# Altium PCB ADF_1st_mixer.PcbDoc
Units mm, origin at the board's own origin, x right, y up, seen from the top; angles counter-clockwise.
Board outline 49.91 x 49.91 mm, 2 copper layers (Top Layer, Bottom Layer); 27 components, 23 nets, 96 pads, 0 vias.
Unrouted connection lines stored in the file: 56.
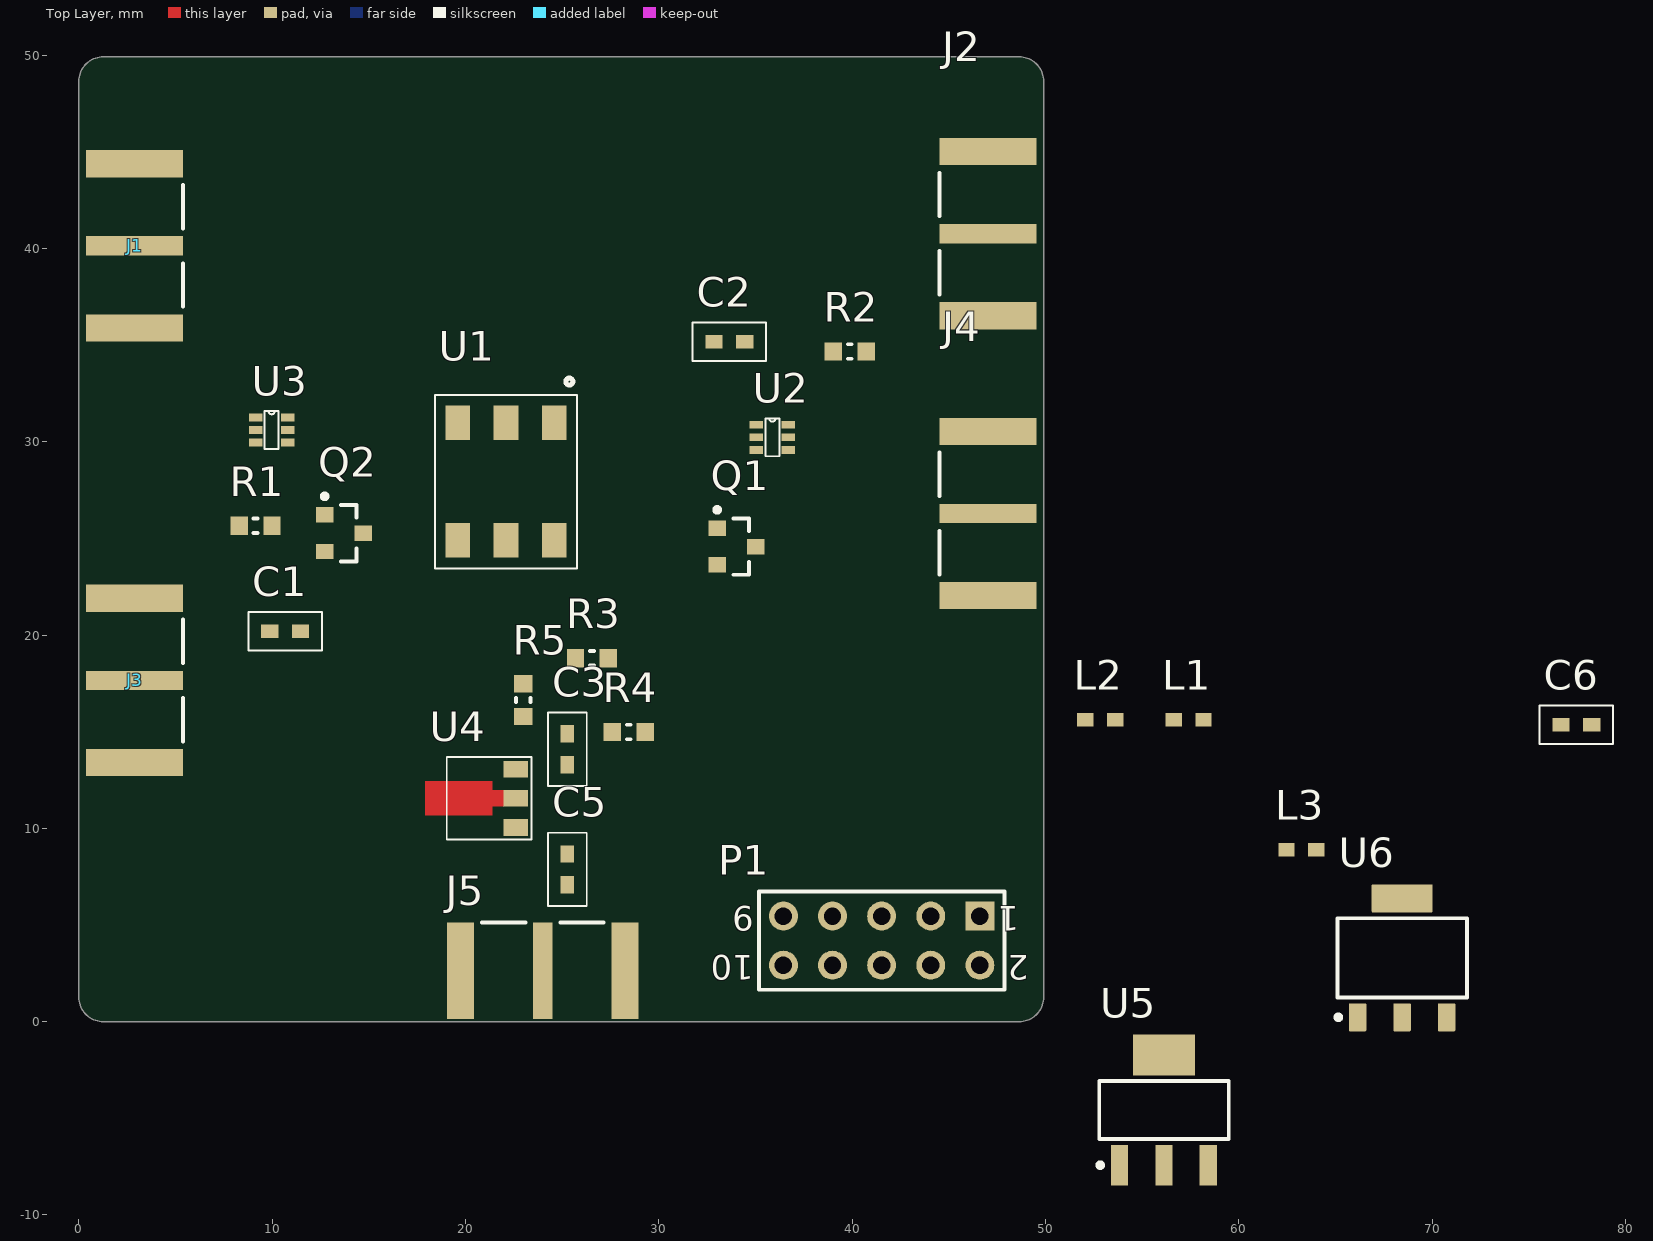
[diagram p0: Top Layer view]
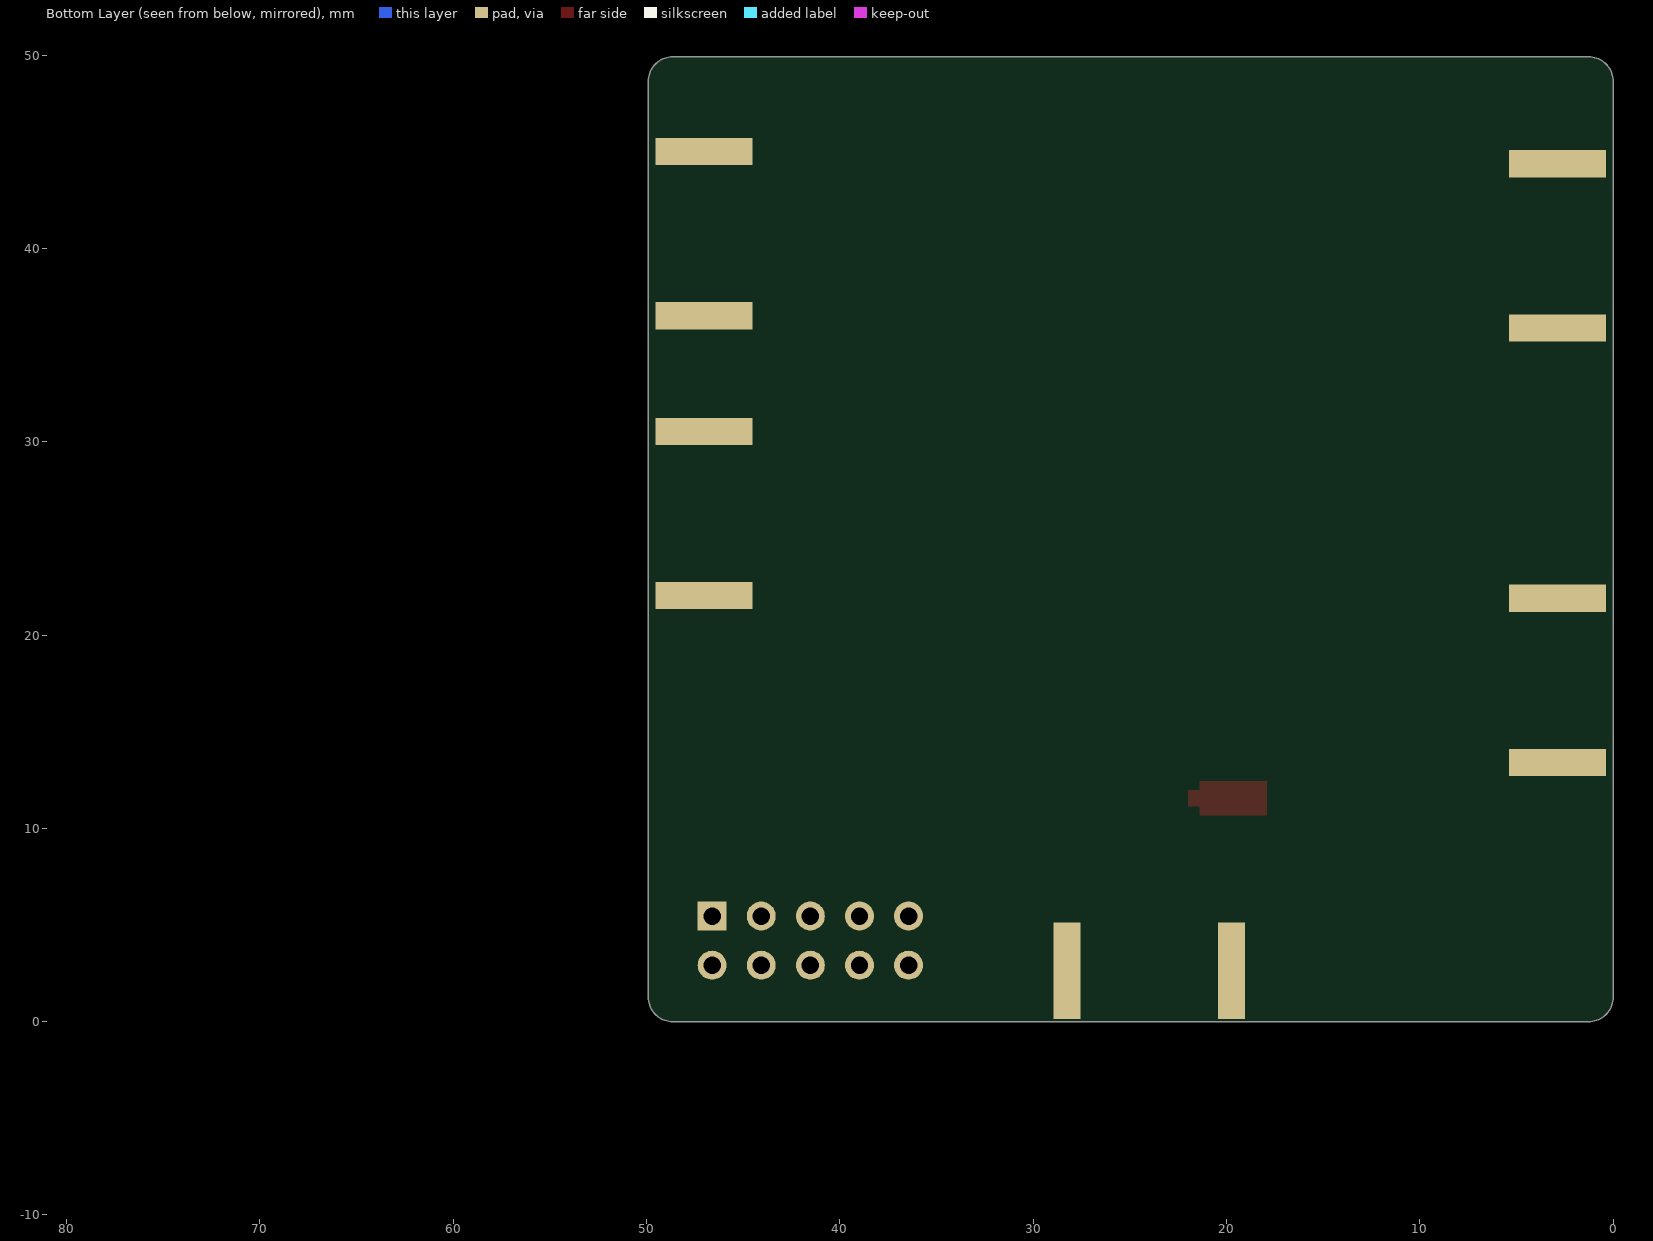
[diagram p1: Bottom Layer view, seen from below]

## Layer stack, top to bottom
Top Solder: solder mask 0.0102, Solder Resist, Dk 3.5
Top Layer: signal copper 0.0356
Dielectric 1: dielectric 0.32, FR-4, Dk 4.8
Bottom Layer: signal copper 0.0356
Bottom Solder: solder mask 0.0102, Solder Resist, Dk 3.5

## Board outline
0,1.27 0,48.641 cw(c1.27,48.641) 1.27,49.911 48.641,49.911 cw(c48.641,48.641) 49.911,48.641 49.911,1.27 cw(c48.641,1.27) 48.641,0 1.27,0 cw(c1.27,1.27)

## Design rules (kind name [scope] priority, off if disabled: settings)
Clearance [All] p1: gap=0.254 ignorepadtopadclearanceinfootprint=FALSE except(0: Arc-Hole Track-Hole SMDPad-Hole THPad-Hole Via-Hole Fill-Hole Poly-Hole Region-Hole Text-Hole)
PolygonConnect [All] p1: connectstyle=Relief reliefconductorwidth=0.254 reliefentries=4 polygonreliefangle="90 Angle" airgapwidth=0.254
RoutingVias [All] p1: holewidth=0.711 width=1.27 viastyle="Through Hole" minholewidth=0.711 minwidth=1.27 maxholewidth=0.711 maxwidth=1.27
SolderMaskExpansion [All] p1: expansion=0.102
Width [All] p1: maxlimit=0.254 minlimit=0.254 preferedwidth=0.254
30 further rules are at their usual default settings.

## Components (designator, comment, footprint, x,y, rotation, side; value= is the part's Value field where it differs from the comment)
C1 "10nF 0603 NP0" C0603_murata 10.668,20.193 r0 top
C2 "10nF 0603 NP0" C0603_murata 33.655,35.179 r0 top
C3 "10nF 0603 NP0" C0603_murata 25.273,14.097 r270 top
C5 "10nF 0603 NP0" C0603_murata 25.273,7.874 r270 top
C6 "10nF 0603 NP0" C0603_murata 77.47,15.367 r0 top
J1 "32K145-400L5" ROS-32K145-400L5_V 0.381,40.132 r90 top
J2 "32K145-400L5" ROS-32K145-400L5_V 49.53,40.767 r270 top
J3 "32K145-400L5" ROS-32K145-400L5_V 0.381,17.653 r90 top
J4 "32K145-400L5" ROS-32K145-400L5_V 49.53,26.289 r270 top
J5 "32K145-400L5" ROS-32K145-400L5_V 24.003,0.127 r180 top
L1 "742792608" SMD-0603 57.404,15.621 r0 top
L2 "742792608" SMD-0603 52.832,15.621 r0 top
L3 "742792608" SMD-0603 63.246,8.89 r0 top
P1 "Header 5X2" HDR2X5 46.609,5.461 r180 top
Q1 "BSS138LT3G" ONSC-SOT-23-3-318-08_V 34.02,24.577 r0 top
Q2 "BSS138LT3G" ONSC-SOT-23-3-318-08_V 13.716,25.273 r0 top
R1 "Resistor" RESC1608X06N_0603 9.144,25.654 r0 top value=10k
R2 "Resistor" RESC1608X06N_0603 39.878,34.671 r0 top value=10k
R3 "Resistor" RESC1608X06N_0603 26.543,18.796 r180 top value=18R
R4 "Resistor" RESC1608X06N_0603 28.448,14.986 r0 top value=300R
R5 "Resistor" RESC1608X06N_0603 22.987,16.637 r270 top value=300R
U1 "ELCM-25MH" SM-87 24.598,30.988 r180 top
U2 "AS213-92LF" SC70_6 35.052,30.876 r0 top
U3 "AS213-92LF" SC70_6 9.145,31.257 r0 top
U4 "AH1G" SOT-89 22.606,10.047 r90 top
U5 "LM1117IMPX-5.0/NOPB" MP04A_L 56.134,-4.572 r90 top
U6 "LM1117MPX-3.3" DCY0004A_L 68.453,3.302 r90 top

## Footprints (in the part's own frame and the unit in brackets; to place one, negate y for a bottom-side part, rotate by r counter-clockwise, add the part's x,y. Pads: shape width x height; smd on the part's side, far side on the other; paste and mask are expansions set on the pad)
C0603_murata [mm]
  rect 0.9x0.7 smd: 1(-0.8,0) 2(0.8,0)
  silkscreen extent -1.9,-1 1.9,1
DCY0004A_L [mm] "SOT223, 4-Leads, Body 6.7x3.7mm, Pitch 2.3mm, IPC High Density"
  rrect11% 1.45x0.9 smd: 1(-3.075,2.3) 2(-3.075,0) 3(-3.075,-2.3)
  rrect7% 1.45x3.15 smd: 4(3.075,0)
  silkscreen extent -3.2,-3.35 2.05,3.42, body extent -3.5,-3.25 3.5,3.25, height 1.62
HDR2X5 [mm] "Connector; Header; 5x2 Position"
  rect 1.5x1.5 hole 0.9: 1(0,0)
  round 1.5 hole 0.9: 2(0,2.54) 3(2.54,0) 4(2.54,2.54) 5(5.08,0) 6(5.08,2.54) 7(7.62,0) 8(7.62,2.54) 9(10.16,0) 10(10.16,2.54)
  silkscreen extent -1.27,-1.27 11.43,3.81
MP04A_L [mm] "SOT223, 4-Leads, Body 6.5x3.5mm, Pitch 2.3mm, Lead Span 7mm, IPC High Density"
  rect 2.1x0.9 smd: 1(-2.85,2.3) 2(-2.85,0) 3(-2.85,-2.3)
  rect 2.1x3.2 smd: 4(2.85,0)
  silkscreen extent -2.97,-3.35 1.5,3.42, body extent -1.86,-3.35 1.86,3.35, height 1.8
ONSC-SOT-23-3-318-08_V [mm] "SOT23, 3-Leads, Body 2.92x1.3mm, Pitch 0.95mm"
  rect 0.9x0.8 smd: 1(-1,0.95) 2(-1,-0.95) 3(1,0)
  silkscreen extent -1.12,-1.46 0.65,2.02, body extent -0.65,-1.46 0.65,1.46, height 1.11
RESC1608X06N_0603 [mm] "Chip Resistor, 2-Leads, Body 1,60x0,80mm, IPC Medium Density"
  rect 0.9x0.95 smd: 1(-0.85,0) 2(0.85,0)
  silkscreen extent -0.1,-0.38 0.1,0.38, body extent -0.85,-0.45 0.85,0.45, height 0.55
ROS-32K145-400L5_V [mm] "SMA Right Angle Jack, Edge Mount, 14.25x9.5x4.46mm, Rosenberger Recommended"
  rect 1x5 smd: 1(0,-2.5)
  rect 1.4x5 smd: MP(-4.25,-2.5) MP(4.25,-2.5)
  rect 1.4x5 smd far side paste-2: ""(-4.25,-2.5) ""(4.25,-2.5)
  silkscreen extent -3.15,-5 3.15,-5, body extent -4.75,-4.75 4.75,9.5, height 4.46
SC70_6 [mm]
  rect 0.7x0.4 smd: 1(0,0) 2(0,-0.65) 3(0,-1.3) 4(1.65,-1.3) 5(1.65,-0.65) 6(1.65,0)
  silkscreen extent 0.47,-1.63 1.18,0.33
SM-87 [mm] "SM-87 Mixer package"
  rect 1.27x1.78 smd: GND(0,0) GND(2.5,6.09) GND(5,6.09) IF(2.5,0) LO(0,6.09) RF(5,0)
  silkscreen extent -1.17,-2.31 6.18,7.55
SMD-0603 [mm]
  rect 0.85x0.7 smd: 1(-0.775,0) 2(0.775,0)
  body extent -0.8,-0.4 0.8,0.4, height 0.79
SOT-89 [mm] "SOT-89/TO-243C case"
  rect 0.86x1.27 smd: 1(0,0) 2(1.51,0) 3(3.02,0)
  Top Layer region: 1.075,0.625 1.95,0.625 1.95,1.215 1.075,1.215
  Top Layer region: 0.61,1.215 2.41,1.215 2.41,4.695 0.61,4.695
  silkscreen extent -0.63,-0.8 3.65,3.57

## Part data
C1 C2 C3 C5 C6: "10nF 0603 NP0 muRata", Capacitance=10nF, Case/Package=0603, Case Code (Metric)=1608, Dielectric=C0G, Manufacturer 1=Murata, Manufacturer Part Number 1=GRM1885C1H103JA01D, Max Operating Temperature=125°C, Min Operating Temperature=-55°C, Package Quantity=4000, Supplier Part Number 1=81-GRM1885C1H103JA1D, Tolerance=5%, Voltage=50V, Case Code (Imperial)=0603, ComponentLink1Description=https://datasheet.ciiva.com/41860/partnumbering-e-01-41860759.pdf, ComponentLink1URL=https://datasheet.ciiva.com/41860/partnumbering-e-01-41860759.pdf, ComponentLink2Description=https://datasheet.ciiva.com/29537/partnumbering-e-01-29537910.pdf, ComponentLink2URL=https://datasheet.ciiva.com/29537/partnumbering-e-01-29537910.pdf, Depth=0.8mm, Height=0.8mm, Lead Free="Lead Free", Lead Pitch=0.5mm, Length=1.6mm, Material=Ceramic, Packaging="Tape and Reel", Pricing 1="1=0.13, 10=0.05, 50=0.05, 100=0.035, 1000=0.024, 10000=0.016 (USD)", REACH SVHC="No SVHC", Stock 1=5, Supplier 1=Mouser, Termination=SMD/SMT, Thickness=0.035inch, Voltage Rating=50V, Voltage Rating (DC)=50V, Width=0.8mm
J1 J2 J3 J4 J5: "SMA Right Angle Jack, Edge Mount, Up to 18 GHz, -55 to 155 degC", ComponentLink1Description="Manufacturer URL", ComponentLink1URL=http://www.rosenberger.de, ComponentLink2Description=Datasheet, ComponentLink2URL=http://rosenberger.de/ok/images/documents/db/32K145-400L5.pdf, ComponentLink3Description="Package Specification", ComponentLink3URL=http://rosenberger.de/ok/images/documents/db/32K145-400L5.pdf, ComponentLink4Description="Series Overview / Design Note", ComponentLink4URL=http://rosenberger.de/ok/images/documents/spez/32.pdf, ComponentLink5Description="Webshop / RFQ", ComponentLink5URL=http://www.rosenberger.com/en/contact/sales/, DatasheetVersion=b00, Desgin Note 2="For more information about DRC setting, please look at following webpage, http://techdocs.altium.com/display/SCRT/Design+Rule+for+Edge-Mount+Connectors", Design Note 1="Footprint in library is a generic example - only application specific footprint delivers High Performance", Mounting Technology="Surface Mount", PackageDescription="SMA Right Angle Jack, Edge Mount, 14.25 x 9.5 x 4.46 mm", PackageReference=32K145-400L5, PackageVersion=b00, PartNumber=32K145-400L5
L1 L2 L3: "SMD EMI Suppression Ferrite Bead WE-CBF, Z = 47 Ohm", DC_Resistance=0R1, ComponentLink1Description="Manufacturer URL", ComponentLink1URL=http://www.we-online.com, ComponentLink2Description=Datasheet, ComponentLink2URL=http://www.we-online.de/katalog/media/pdf/742792608.pdf, DatasheetVersion=Dec-2005, Impedance="47 Ohm", OrderCode=1635681RL, PackageDescription="Chip Inductor, 2-Leads, Body 1.6 x 0.8 mm", PackageReference=SMD-0603, PackageVersion=2009, Seller=Farnell
P1: "Header, 5-Pin, Dual row", LatestRevisionDate=17-Jul-2002, LatestRevisionNote="Re-released for DXP Platform.", Publisher="Altium Limited"
Q1 Q2: library part CMP-1058-00765-1, "Power MOSFET, 200 mA, 50 V, N-Channel, 3-Pin SOT-23, Pb-Free, Tape and Reel", Manufacturer="On Semiconductor", Package Type=SOT-23-3, Channel Polarity="N Channel", Ciss Typ (pF)=40, ComponentLink1Description="Manufacturer URL", ComponentLink1URL=http://www.onsemi.com/, ComponentLink2Description=Datasheet, ComponentLink2URL=http://www.onsemi.com/pub_link/Collateral/BSS138LT1-D.PDF, ComponentLink3Description="Package Specification", ComponentLink3URL=http://www.onsemi.cn/pub_link/Collateral/318-08.PDF, Configuration=Single, Coss Typ (pF)=12, Crss Typ (pF)=3.5, DatasheetVersion="Rev. 8", ID Max (A)=0.2, Mounting Technology="Surface Mount", PackageDescription="3-Pin Small Outline Transistor, Body 2.92 x 1.3 mm, Pitch 0.95 mm", PackageReference=SOT-23-3-318-08, PackageVersion="Rev. AP, 11/2009", Packing="Tape and Reel", PartNumber=BSS138LT3G, PD Max (W)=0.225, RoHS=Pb-Free, V(BR)DSS Min (V)=50, VGS(th) Max (V)=1.5, VGS Max (V)=20
R1 R2: library part Resistor_SMD_Generic, "Generic SMD Resistor", Manufacturer=SUSUMU, ManufacturerRef=RR0816P-104-B-T5, PowerRating=63mW, TemperatureCoeff="± 25ppm/°C", Tolerance="± 0.1%", Voltage=75V, OrderCode=1653254RL, PackageDescription=SMD, PackageReference=SMD-0603, PriceEuro=0.085, Publisher=atr, Seller=Farnell, Type="Thin Film"
R3 R4 R5: library part Resistor_0R_0603_Bulk, "Bulk SMD Resistor", Manufacturer=PANASONIC, ManufacturerRef=ERJ3GEY0R00V, PowerRating=100mW, TemperatureCoeff="± 200ppm/°C", Tolerance=-, Voltage=75V, OrderCode=2059527RL, PackageDescription=SMD, PackageReference=SMD-0603, PriceEuro=0.005, Published=15.5.2014, Publisher=atr, Seller=Farnell, Type="Thick Film"
U1: Manufacturer 1="TE Connectivity MA-COM", Manufacturer Part Number 1=ELCM-25MHTR, RF Power=+9dBm, ComponentLink1Description=http://www.macomtech.com/DataSheets/ELCM-25MH.pdf, ComponentLink1URL=http://www.macomtech.com/DataSheets/ELCM-25MH.pdf, LO Drive=+13dBm, Stock 1=0, Supplier 1=Avnet, Supplier Part Number 1=ELCM-25MH
U2 U3: "Switch SPDT 0.1-3GHZ GAAS SC70-6", Frequency - Lower=100MHz, Frequency - Upper=3GHz, Insertion Loss @ Frequency="0.5dB @ 3GHz", Isolation @ Frequency="19dB @ 3GHz (typ)", Manufacturer 1="Skyworks Solutions Inc.", Operating Temperature="-40°C ~ 85°C", Package / Case="6-TSSOP, SC-88, SOT-363", Supplier Device Package=SC-70-6, Supplier Part Number 1=863-1238-1-ND, Voltage - Supply=3V, Category="RF/IF and RFID", Circuit=SPDT, ComponentLink1Description=http://www.skyworksinc.com/uploads/documents/200193D.pdf, ComponentLink1URL=http://www.skyworksinc.com/uploads/documents/200193D.pdf, Features=-, IIP3="40dBm (typ)", Impedance="50 Ohm", Manufacturer Part Number 1=AS213-92LF, P1dB="27dBm (typ) IP1dB", Packaging="Cut Tape (CT)", Pricing 1="1=0.41, 100=0.3393 (EUR)", RF Type="Bluetooth, WLAN", RoHS="RoHS Compliant", Stock 1=26253, Supplier 1=Digi-Key, Topology=Reflective
U4: "250-4000MHz MMIC", Case/Package=SOT-89, Frequency=4GHz, Manufacturer 1=TriQuint, Manufacturer Part Number 1=AH1, Supplier Part Number 1=15B6194, Supply Voltage=5V, ComponentLink1Description=https://www.verical.com/server-webapp/html/getDatasheet?partID=559390, ComponentLink1URL=https://www.verical.com/server-webapp/html/getDatasheet?partID=559390, Gain=13.5dB, Mount="Surface Mount", Number of Channels=1, P1dB=+22dBm, Pricing 1="1=37.74, 25=34.58, 50=32.12, 100=31.07, 250=30.01 (USD)", Radiation Hardening=No, Stock 1=0, Supplier 1=Newark
U5: library part CMP-0062-01628-3, "800mA Low-Dropout Linear Regulator, 4-pin SOT-223, Pb-Free", Manufacturer="National Semiconductor", PackageTopMarking=XYTT*N06B, PowerWise=N, Code_IPC=SOT223-4, Code_JEDEC=TO-261-AA, ComponentLink1Description="Manufacturer URL", ComponentLink1URL=http://www.national.com/, ComponentLink2Description="LM1117 Datasheet", ComponentLink2URL=http://www.national.com/ds/LM/LM1117.pdf, ComponentLink3Description="LM1117 Web Page", ComponentLink3URL=http://www.national.com/pf/LM/LM1117.html, ComponentLink4Description="MP04A Package Page", ComponentLink4URL=http://www.national.com/packaging/folders/mp04a.html, CompType="LDO IC", DatasheetVersion=Apr-2006, High-Reliability=Y, PackageDescription="Molded SOT-223, 6.50 x 3.56 x 1.6mm Body, 4 Lead, 2.3mm Pitch", PackageReference=MP04A, PackageVersion="revB, Apr-2003", PartNumber=LM1117IMPX-5.0/NOPB, PinCount=4, RevisionNote="SCH symbol layout adjusted", RoHS=Y
U6: library part CMP-0062-01659-4, "800mA Low-Dropout Linear Regulator, 4-pin SOT-223", Manufacturer="Texas Instruments", PackageTopMarking=XYTT*N05A, PowerWise=N, Code_IPC=SOT223-4, Code_JEDEC=TO-261-AA, ComponentLink1Description="Datasheet URL", ComponentLink1URL=http://www.ti.com/general/docs/lit/getliterature.tsp?genericPartNumber=LM1117-N&fileType=pdf, CompType="LDO IC", High-Reliability=Y, PackageDescription="Molded SOT-223, 6.50 x 3.56 x 1.6mm Body, 4 Lead, 2.3mm Pitch", PackageReference=DCY0004A, PartNumber=LM1117MPX-3.3, PinCount=4, RoHS=N

## Nets (pads, with @x,y where several pads share a name; then routed paths per layer and width w, separated by ;. In a path a pad name is that pad's centre, name@x,y a point inside that pad or via, vN(x,y) a via of type N, cw(c..) or ccw(c..) an arc to the next point about the centre after c; other vN are vias at no path point)
3.3V: C1.1 C2.2 R1.2 R2.2 U6.2
5V: C6.2 L1.1 L3.1 U5.2
GND: C1.2 C2.1 C6.1 J1.MP J2.MP J3.MP J4.MP J5.MP P1.9 P1.10 Q1.2 Q2.2 R4.2 R5.2 U1.GND U3.2 U4.2 U5.1 U6.1
NetC3_1: C3.1 R3.1 R5.1
NetC3_2: C3.2 L3.2 U4.3
NetC5_1: C5.1 U4.1
NetC5_2: C5.2 J5.1
NetJ1_1: J1.1 U3.1
NetJ2_1: J2.1 U3.3
NetJ3_1: J3.1 U2.1
NetJ4_1: J4.1 U2.3
NetL1_2: L1.2 U6.3
NetL2_2: L2.2 U5.3
NetQ1_1: Q1.1 U2.4
NetQ1_3: Q1.3 R2.1 U2.6
NetQ2_1: Q2.1 U3.4
NetQ2_3: Q2.3 R1.1 U3.6
NetR3_2: R3.2 R4.1 U1.LO
NetU1_IF: U1.IF U2.5
NetU1_RF: U1.RF U3.5
RX_Enable: P1.4
TX_Enable: P1.3
VCC: L2.1 P1.7 P1.8
pads on no net: J1. J2. J3. J4. J5. P1.1 P1.2 P1.5 P1.6 U2.2 U5.4 U6.4

## Silkscreen, mask and mechanical layers (free items; w line width, h text height)
Mechanical 1:
  lines w0.5: 0,1.27 ccw(c1.27,1.27) 1.27,0 48.641,0 ccw(c48.641,1.27) 49.911,1.27 49.911,48.641 ccw(c48.641,48.641) 48.641,49.911 1.27,49.911 ccw(c1.27,48.641) 0,48.641 0,6.35 0,1.27

## Text inside footprints (layer, text, board x,y; h text height)
J1: Mechanical 3 "Board Edge" at 0.381,32.032 h0.2 r90
J2: Mechanical 3 "Board Edge" at 49.53,48.867 h0.2 r270
J3: Mechanical 3 "Board Edge" at 0.381,9.553 h0.2 r90
J4: Mechanical 3 "Board Edge" at 49.53,34.389 h0.2 r270
J5: Mechanical 3 "Board Edge" at 32.103,0.127 h0.2 r180
P1: Top Overlay "10" at 34.925,3.429 h1.27 r180; Top Overlay "9" at 34.925,5.969 h1.27 r180; Top Overlay "1" at 48.641,5.969 h1.27 r180; Top Overlay "2" at 49.149,3.429 h1.27 r180